# EAGLE board h_bridge5 (EAGLE 4.16)
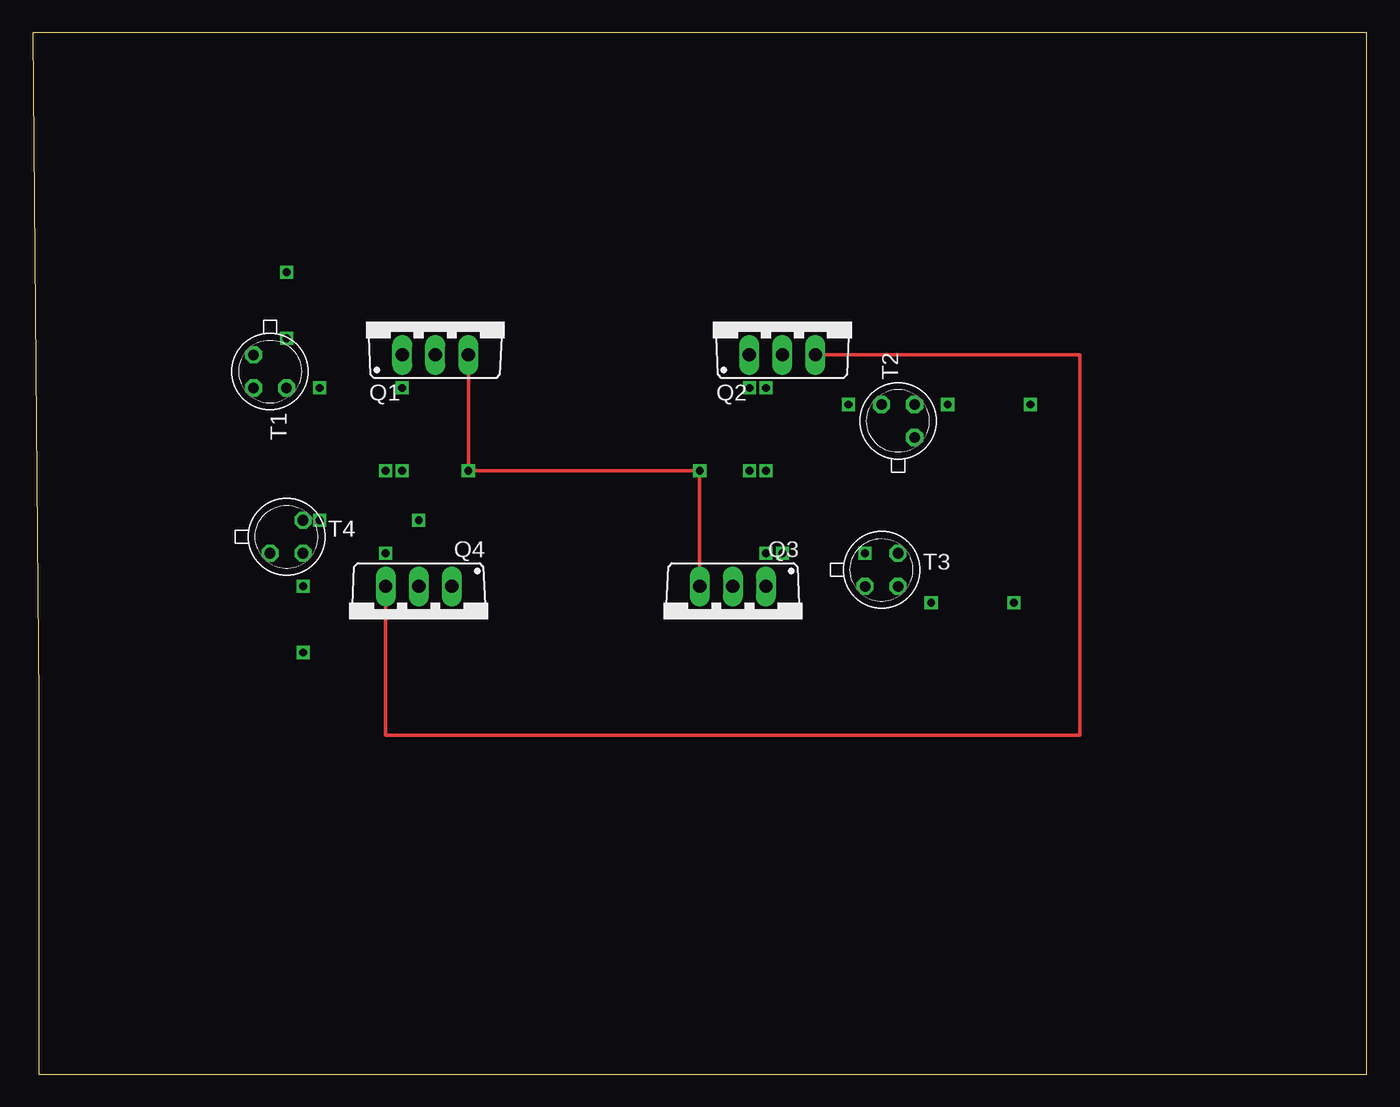
[diagram p0: board, top side]
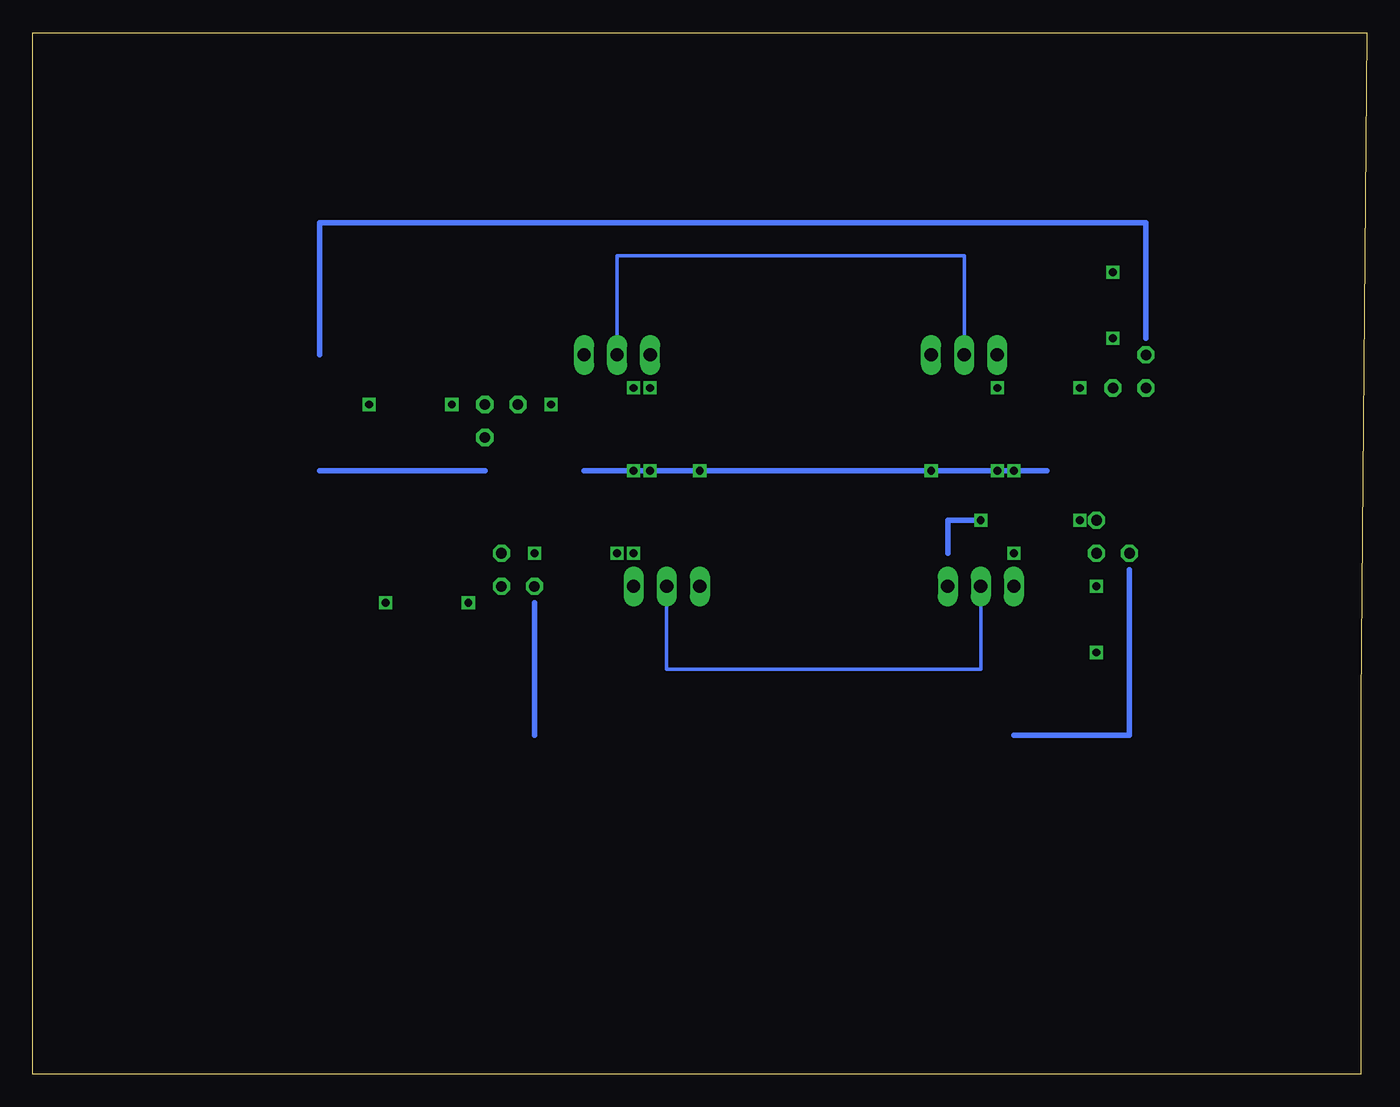
[diagram p1: board, bottom side, seen from below]

Size 102.54 x 80 mm. Coordinates in mm from the lower left corner, seen from the top.
Outline: 102.54,0 102.54,80 0,80 0.47,28.57 0.47,0 102.54,0
Copper layers (1*16): Top 0.035mm / dielectric 1.5mm / Bottom 0.035mm
Design rules "default": minimum track width 10mil, minimum drill 24mil, track to track 8mil, track to pad 8mil, pad to pad 8mil, via to via 8mil, smd to smd 8mil, copper to edge 40mil, drill to drill 8mil, minimum pad ring 10mil, minimum via ring 8mil, stop-mask expansion 4mil, vias tented up to drill 0mil, thermal gap 10mil

## Footprints (pad centres in the part's own frame; a part is rotated, then mirrored left to right if it is on the bottom)
TO220BV = drill 1.016 long: D 0,-2.54; G -2.54,-2.54; S 2.54,-2.54
TO18 = drill 0.813 octagon: 1 -1.27,-1.27; 2 1.27,-1.27; 3 1.27,1.27

## Placement (x,y rotation side)
Q1  IRF9530  [TO220BV]  30.95,57.78 0 top
Q2  IRF740  [TO220BV]  57.62,57.78 0 top
Q3  IRF9530  [TO220BV]  53.81,34.92 180 top
Q4  IRF740  [TO220BV]  29.68,34.92 180 top
T1  2N2222  [TO18]  18.25,53.97 270 top
T2  2N2222  [TO18]  66.51,50.16 90 top
T3  2N2222  [TO18]  65.24,38.73 0 top
T4  2N2222  [TO18]  19.52,41.27 0 top

## Library data of the parts
Q1-Q4 = transistor-power
T1-T4 = transistor

## Nets
+12V: Q1.S Q3.S
GND: Q2.S Q4.S
N$2: T3.1
N$3: Q3.D Q4.D
N$4: Q1.D Q2.D
N$8: T3.2
N$11: T1.2
N$13: T4.3
N$14: T4.2
N$15: T2.2
N$16: T2.3
N$17: Q2.G
N$18: T4.1
N$19: T2.1
N$22: T1.1

## Tracks (layer width: path | path; a pad name or v marks a point on that pad's centre or on a via)
+12V  (via drill 0.6)
  Top 0.254: Q3.S v51.27,46.35 v33.49,46.35 Q1.S
  Bottom 0.406: 60.16,46.35 v56.35,46.35 v55.08,46.35 v51.27,46.35 v33.49,46.35 v27.14,46.35 24.6,46.35
GND
  Top 0.254: Q4.S 27.14,26.03 80.48,26.03 80.48,55.24 Q2.S
N$3
  Bottom 0.254: Q3.D 53.81,33.65 53.81,31.11 29.68,31.11 Q4.D
N$4
  Bottom 0.254: Q1.D 30.95,62.86 57.62,62.86 Q2.D
N$7  (via drill 0.6)
  other vias: 28.41,46.35
N$9  (via drill 0.6)
  other vias: 27.14,40
N$10  (via drill 0.6)
  other vias: 28.41,52.7
N$12  (via drill 0.6)
  other vias: 55.08,52.7
N$21  (via drill 0.6)
  other vias: 56.35,40
N$23  (via drill 0.6)
  other vias: 62.7,51.43
N$24  (via drill 0.6)
  other vias: 56.35,52.7
S$1  (via drill 0.6)
  other vias: 63.97,40
S$2  (via drill 0.6)
  other vias: 57.62,40
S$3
  Bottom 0.406: 67.78,46.35 80.48,46.35
S$4
  Bottom 0.406: 63.97,36.19 63.97,26.03
S$5  (via drill 0.6)
  other vias: 70.32,51.43
S$6  (via drill 0.6)
  other vias: 76.67,51.43
S$7  (via drill 0.6)
  other vias: 69.05,36.19
S$8  (via drill 0.6)
  other vias: 75.4,36.19
S$9  (via drill 0.6)
  other vias: 22.06,52.7
S$10  (via drill 0.6)
  other vias: 22.06,42.54
S$11  (via drill 0.6)
  Bottom 0.406: v29.68,42.54 32.22,42.54 32.22,40
S$12
  Bottom 0.406: 18.25,38.73 18.25,26.03 27.14,26.03
S$13
  Bottom 0.406: 16.98,56.51 16.98,65.4 80.48,65.4 80.48,55.24
S$14  (via drill 0.6)
  other vias: 20.79,37.46
S$15  (via drill 0.6)
  other vias: 20.79,32.38
S$16  (via drill 0.6)
  other vias: 19.52,56.51
S$17  (via drill 0.6)
  other vias: 19.52,61.59